# EAGLE board MJ828 - rev.3 - TCAN334 - prod (EAGLE 9.6.2)
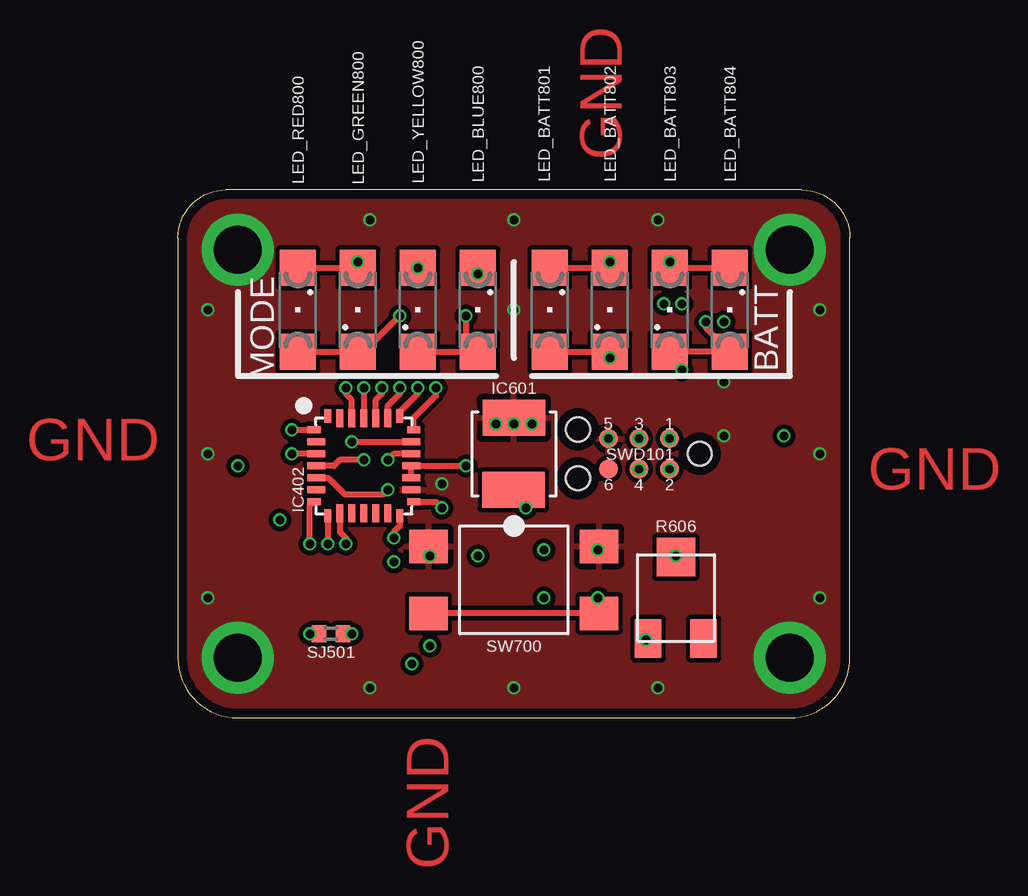
[diagram p0: board, top side]
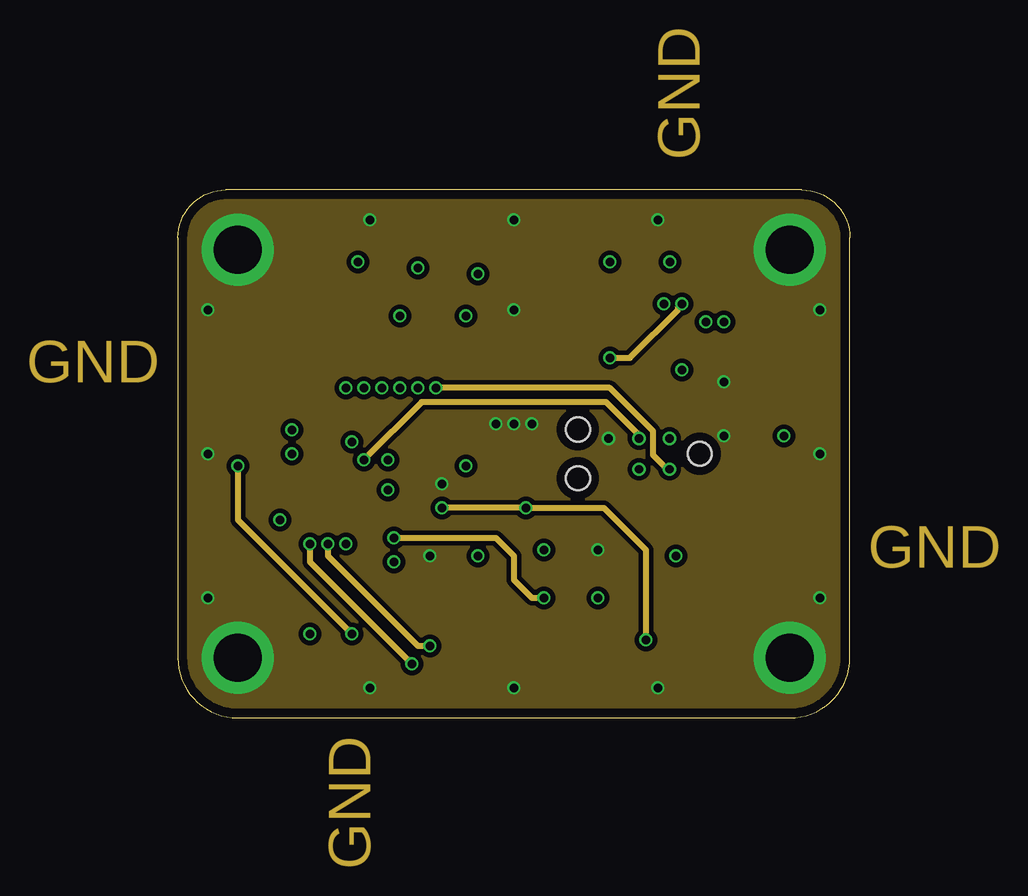
[diagram p1: board, inner layer Route2]
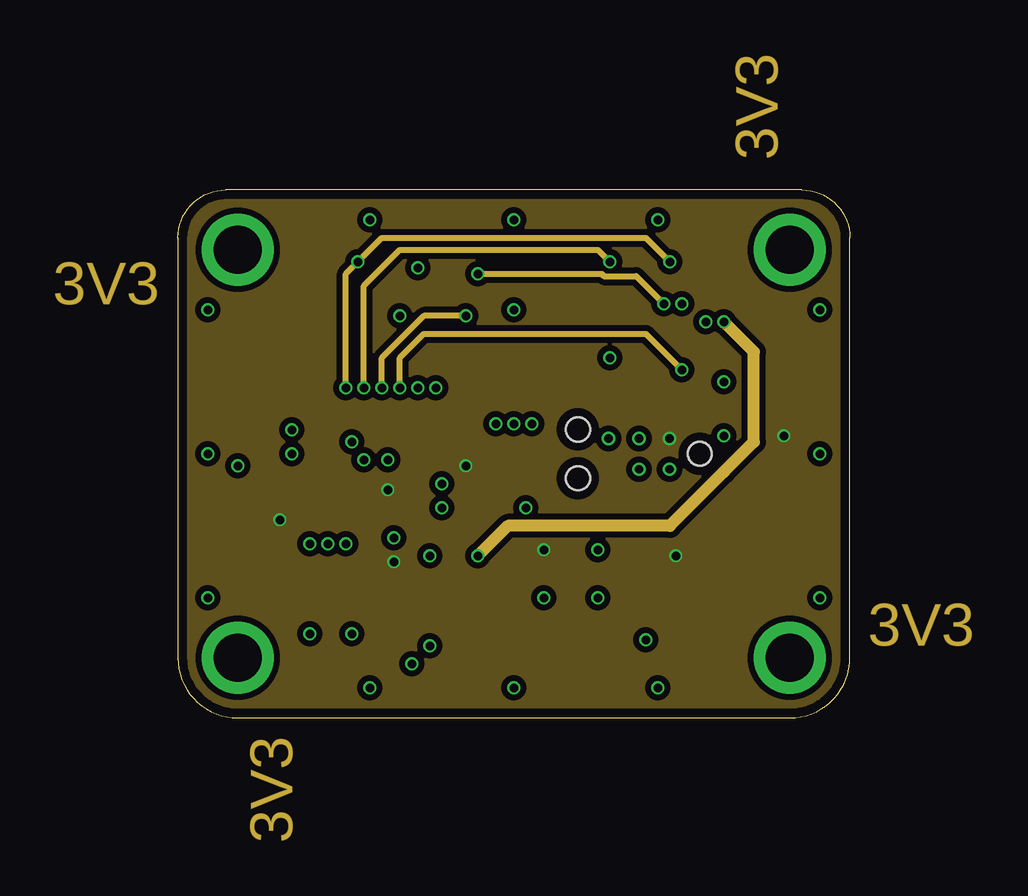
[diagram p2: board, inner layer Route15]
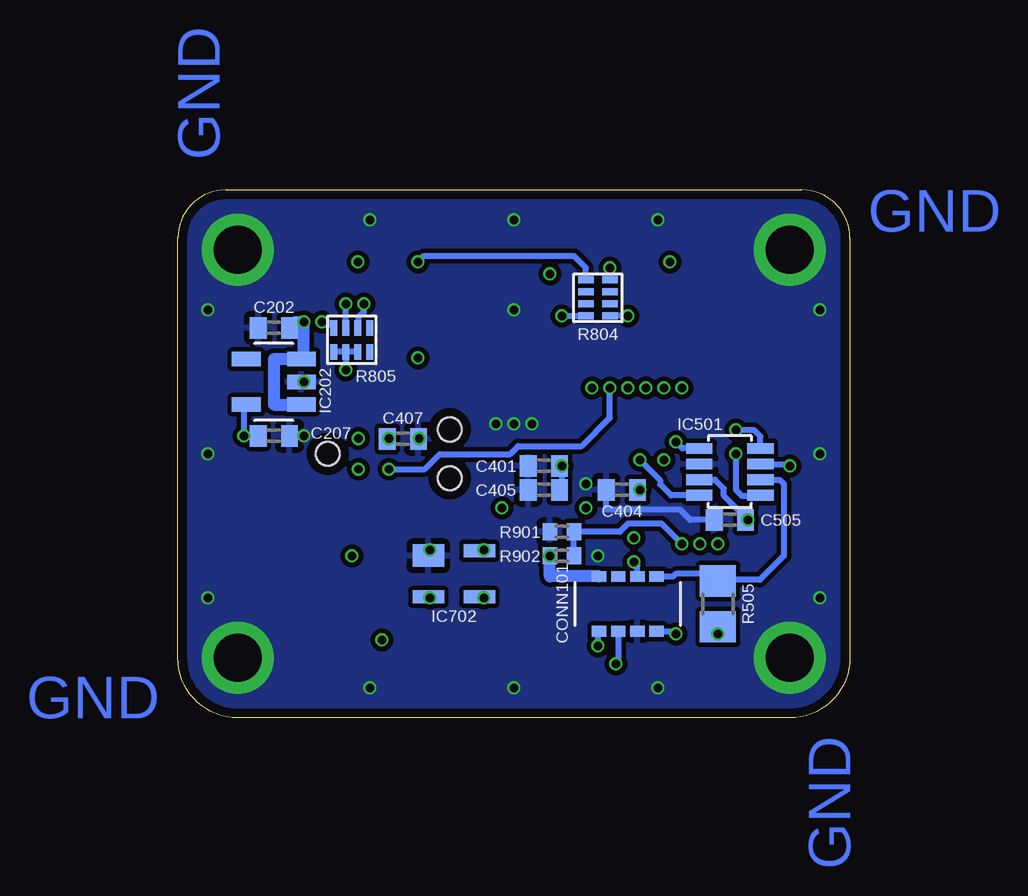
[diagram p3: board, bottom side, seen from below]

Size 28 x 22 mm. Coordinates in mm from the lower left corner, seen from the top.
Outline: 26,22 arc-90 28,20
Outline: 25.5,0 arc90 28,2.5
Outline: 0,2.5 arc90 2.5,0
Outline: 26,22 arc-90 28,20
Outline: 25.5,0 arc90 28,2.5
Outline: 0,2.5 arc90 2.5,0
Outline: 0,2.5 0,20 arc-90 2,22 26,22
Outline: 2.5,0 25.5,0
Outline: 28,2.5 28,20
Copper layers (1*2*15*16): Top 0.035559375mm / dielectric 0.17018125mm / Route2 0.01778125mm / dielectric 47mil / Route15 0.01778125mm / dielectric 0.17018125mm / Bottom 0.035559375mm
Design rules "oshpark-4layer": minimum track width 5mil, minimum drill 10mil, track to track 5mil, track to pad 5mil, pad to pad 5mil, via to via 5mil, smd to smd 5mil, copper to edge 15mil, drill to drill 6mil, minimum pad ring 4mil, minimum via ring 4mil, stop-mask expansion 1.5mil, vias tented up to drill 0mil, thermal gap 10mil
Net classes: 0 GND: width 0.25 mm, drill 0.35 mm, clearance 0.19 mm; 1 BAT+: width 0.5 mm, drill 0.35 mm, clearance 0.19 mm; 3 signal: width 0.25 mm, drill 0.35 mm, clearance 0.19 mm; 4 3V3: width 0.25 mm, drill 0.35 mm, clearance 0.25 mm

## Footprints (pad centres in the part's own frame; a part is rotated, then mirrored left to right if it is on the bottom)
C0402 = smd 0.7 x 0.9: 1 -0.65,0; 2 0.65,0
SMD = smd 0.6 x 0.45: P$1 -1.2,1.14; P$2 -0.4,1.14; P$3 0.4,1.14; P$4 1.2,1.14; P$5 1.2,-1.14; P$6 0.4,-1.14; P$7 -0.4,-1.14; P$8 -1.2,-1.14
SOT-23-5L = smd 0.6 x 1.2: ADJ/NC -0.95,-1.15; EN -0.95,1.15; GND 0,1.15; IN 0.95,1.15; OUT 0.95,-1.15
UFQFPN-28 = smd 0.55 x 0.3: 1_PB8 -2.08,1.5; 7_PA1 -2.08,-1.5; 15_PB1 2.08,-1.5; 21_PA13 2.08,1.5 | smd 0.75 x 0.3: 2_PF0 -1.98,1; 3_PF1 -1.98,0.5; 4_NRST -1.98,0; 5_VDDA -1.98,-0.5; 6_PA0 -1.98,-1; 16_VSS 1.98,-1; 17_VDD 1.98,-0.5; 18_VDDIO2 1.98,0; 19_PA9-[PA11] 1.98,0.5; 20_PA10-[PA12] 1.98,1 | smd 0.3 x 0.55: 8_PA2 -1.5,-2.08; 14_PB0 1.5,-2.08; 22_PA14 1.5,2.08; 28_PB7 -1.5,2.08 | smd 0.3 x 0.75: 9_PA3 -1,-1.98; 10_PA4 -0.5,-1.98; 11_PA5 0,-1.98; 12_PA6 0.5,-1.98; 13_PA7 1,-1.98; 23_PA15 1,1.98; 24_PB3 0.5,1.98; 25_PB4 0,1.98; 26_PB5 -0.5,1.98; 27_PB6 -1,1.98
SOT23-8 = smd 0.45 x 1.1: P$1 -0.975,-1.275; P$2 -0.325,-1.275; P$3 0.325,-1.275; P$4 0.975,-1.275; P$5 0.975,1.275; P$6 0.325,1.275; P$7 -0.325,1.275; P$8 -0.975,1.275
P-LCC-2 = smd 2.6 x 1.5: COLLECTOR -0.02,-1.5; EMITTER 0,1.5
4SOT143 = smd 0.94 x 1.31: 1_GND -0.76,-1.06 | smd 0.55 x 1.31: 2_IN 0.96,-1.06; 3_OUT 0.96,1.06; 4_VCC -0.96,1.06
SML1206 = smd 1.5 x 1.5: A 1.75,0; C -1.75,0
R0805 = smd 1.3 x 1.5: 1 -0.95,0; 2 0.95,0
3313 = smd 1.1 x 1.6: 1_CCW 1.155,-1.7; 3_CW -1.155,-1.7 | smd 1.6 x 1.6: 2_WIPER 0,1.7
0402 = smd 0.65 x 0.3: 1 -0.5,-0.75; 2 0.5,-0.75; 3 -0.5,-0.25; 4 0.5,-0.25; 5 -0.5,0.25; 6 0.5,0.25; 7 -0.5,0.75; 8 0.5,0.75
R0402 = smd 0.6 x 0.7: 1 -0.5,0; 2 0.5,0
SMD' = smd 1.6 x 1.4: 1 -3.556,-1.397; 2 3.556,-1.397; 3 -3.556,1.397; 4 3.556,1.397
TC2030-NL = smd 0.787 x 0.787: 1_TVCC 1.27,-0.635; 2_T_SWDIO 1.27,0.635; 3_T_NRST 2.54,-0.635; 4_T_SWCLK 2.54,0.635; 5_GND 3.81,-0.635; 6_T_SWO 3.81,0.635 | hole 0.991: 0,0; 5.08,-1.016; 5.08,1.016

## Placement (x,y rotation side)
C202  1μF / 10V  [C0402]  24,16.25 180 bottom
C207  1μF  [C0402]  24,11.75 180 bottom
C401  0.1u  [C0402]  12.75,10.5 0 bottom
C404  1u  [C0402]  9.5,9.5 0 bottom
C405  0.1u  [C0402]  12.75,9.5 0 bottom
C407  0.1u  [C0402]  18.62,11.62 180 bottom
C505  0.1μF  [C0402]  5,8.25 180 bottom
CONN101  104250-0820  [SMD]  9.25,4.75 180 bottom
IC202  LDK320AM33R  [SOT-23-5L]  24,14 270 bottom
IC402  STM32F042G6U6  [UFQFPN-28]  7.75,10.5 0 top
IC501  TCAN334  [SOT23-8]  5,10.25 270 bottom
IC601  SFH 320 FA-Z  [P-LCC-2]  14,11 0 top
IC702  MAX6816EUS+T  [4SOT143]  16.5,6 270 bottom
LED_BATT801  156120BS82500  [SML1206]  15.5,17 270 top
LED_BATT802  156120BS82500  [SML1206]  18,17 90 top
LED_BATT803  156120BS82500  [SML1206]  20.5,17 90 top
LED_BATT804  156120BS82500  [SML1206]  23,17 270 top
LED_BLUE800  156120BS82500  [SML1206]  12.5,17 270 top
LED_GREEN800  156120VS82500  [SML1206]  7.5,17 90 top
LED_RED800  156120RS82500  [SML1206]  5,17 270 top
LED_YELLOW800  156120YS82500  [SML1206]  10,17 90 top
R505  120  [R0805]  5.5,4.75 270 bottom
R606  3313J-1-104E - 100k  [3313]  20.75,5 0 top
R804  741X083151JP / 150Ω  [0402]  10.5,17.5 180 bottom
R805  741X083101JP / 100Ω  [0402]  20.75,15.75 270 bottom
R901  100k  [R0402]  12,7.75 0 bottom
R902  100k  [R0402]  12,6.75 180 bottom
SJ501  CAN termination  [R0402]  6.38,3.5 0 top
SW700  TL3305CF160QG  [SMD']  14,5.75 0 top
SWD101  TC2030-NL  [TC2030-NL]  21.75,11 180 top

## Library data of the parts
C202 C207 C401 C404 C405 C407 C505 = rcl; SPICEPREFIX: C
CONN101 = 1042500820 - Board to Board Connector, 8p - Header
IC202 = LDK320 5V LDO
IC402 = STM32F042G6
IC501 = TCAN33x - 3.3V CAN Transciever
IC601 = SFH 320 FA - IR Phototransistor
IC702 = MAX6818 CMOS Switch debouncer
LED_BATT801-LED_BATT804 LED_BLUE800 LED_GREEN800 LED_RED800 LED_YELLOW800 = led
R505 R901 R902 SJ501 = rcl; SPICEPREFIX: R
R606 = 3313 - Trim Poti
R804 R805 = 741X083331JP Resistor Array
SW700 = TL3305-844809 SPST-NO Tact Switch
SWD101 = tag-connect

## Nets
3V3 [3V3]: C207.2 C401.2 C404.2 C405.2 C505.1 CONN101.P$7 IC202.OUT IC402.5_VDDA IC402.17_VDD IC402.18_VDDIO2 IC501.P$3 IC702.4_VCC R606.2_WIPER SWD101.1_TVCC
!SHDN!: IC402.3_PF1 IC501.P$5
!STBY! [signal]: IC402.1_PB8 IC501.P$8
BAT+ [BAT+]: C202.1 CONN101.P$5 IC202.EN IC202.IN R902.2
BREAK_IN [signal]: CONN101.P$4 IC402.8_PA2
CAN_H [signal]: CONN101.P$1 IC501.P$7 SJ501.2
CAN_INFRA:CAN_JMPR [signal]: R505.2 SJ501.1
CAN_L [signal]: CONN101.P$8 IC501.P$6 R505.1
CAN_RX [signal]: IC402.19_PA9-[PA11] IC501.P$4
CAN_TX [signal]: IC402.20_PA10-[PA12] IC501.P$1
CP1 [signal]: IC402.26_PB5 LED_BATT803.A LED_BATT804.C LED_GREEN800.A LED_RED800.C
CP2 [signal]: IC402.24_PB3 LED_BLUE800.A LED_YELLOW800.C R804.8
CP3 [signal]: IC402.25_PB4 LED_BATT801.C LED_BATT802.A R804.2
CP4 [signal]: IC402.23_PA15 R805.2 R805.4 R805.6
GND: C202.2 C207.1 C401.1 C404.1 C405.1 C407.1 C505.2 CONN101.P$2 IC202.GND IC402.16_VSS IC501.P$2 IC601.EMITTER IC702.1_GND R901.1 SW700.3 SW700.4 SWD101.5_GND
HIGH_IN [signal]: CONN101.P$3 IC402.7_PA1
LED:D_BATT1&2 [signal]: LED_BATT801.A LED_BATT802.C R805.3
LED:D_BATT3&4 [signal]: LED_BATT803.C LED_BATT804.A R805.1
LED:D_BLUE [signal]: LED_BLUE800.C R805.5
LED:D_RED&GREEN [signal]: LED_GREEN800.C LED_RED800.A R804.7
LED:D_YELLOW [signal]: LED_YELLOW800.A R804.1
PHOTOTRANSISTOR: IC402.15_PB1 IC601.COLLECTOR R606.3_CW
PUSHBUTTON:SWITCH_IN: IC702.2_IN SW700.1 SW700.2
SWITCH: IC402.14_PB0 IC702.3_OUT
SYS_NRST [signal]: C407.2 IC402.4_NRST SWD101.3_T_NRST
SYS_SWCLK [signal]: IC402.22_PA14 SWD101.4_T_SWCLK
SYS_SWDIO [signal]: IC402.21_PA13 SWD101.2_T_SWDIO
VBAT+: IC402.9_PA3 R901.2 R902.1

## Tracks (layer width: path | path; a pad name or v marks a point on that pad's centre or on a via)
3V3  (via drill 0.35)
  Top 0.25: IC402.17_VDD IC402.18_VDDIO2 v12,10.5 | SWD101.1_TVCC v20.48,11.64 | R606.2_WIPER v20.75,6.75 | v8.75,9.5 8.55,9.3 6.97,9.3 6.27,10 IC402.5_VDDA
  Bottom 0.25: IC202.OUT 25.25,12.95 v25.25,11.75 C207.2 | CONN101.P$7 8.85,6.35 v9,6.5 | C401.2 v12,10.5 12,9.6 C405.2 | IC702.4_VCC 15.29,6.96 v15.25,7 | C404.2 v8.75,9.5 | v4.25,8.25 C505.1 4.35,8.35 5.25,9.25 5.25,9.55 5.62,9.93 IC501.P$3
  pour Route15: 0,22 28,22 28,0 0,0
!SHDN!  (via drill 0.35)
  Top 0.25: IC402.3_PF1 v4.75,11
  Bottom 0.25: v4.75,11 4.75,9.5 4.5,9.25 3.75,9.25 IC501.P$5
!STBY!  (via drill 0.35)
  Top 0.25: v4.75,12 IC402.1_PB8
  Bottom 0.25: v4.75,12 4,12 3.73,11.72 IC501.P$8
BAT+  (via drill 0.35)
  Route15 0.5: R902.2 13.75,8 20.5,8 22.75,10.25 24,11.5 24,15.25 v22.75,16.5
  Bottom 0.5: C202.1 23.1,16.5 v22.75,16.5 22.75,15.05 IC202.EN 24,14.95 24,13.05 IC202.IN | R902.2 12.5,5.89 CONN101.P$5
  other vias: 12.5,6.75
BREAK_IN  (via drill 0.35)
  Top 0.25: IC402.8_PA2 v6.25,7.25
  Route2 0.25: v6.25,7.25 6.25,6.75 10,3 v10.5,3
  Bottom 0.25: CONN101.P$4 10.5,3.56 v10.5,3
CAN_H  (via drill 0.35)
  Top 0.25: v7.25,3.5 SJ501.2
  Route2 0.25: v7.25,3.5 2.5,8.25 v2.5,10.5
  Bottom 0.25: v2.5,10.5 2.58,10.57 IC501.P$7 | CONN101.P$1 7.36,3.61 v7.25,3.5
CAN_INFRA:CAN_JMPR  (via drill 0.35)
  Top 0.25: v5.5,3.5 SJ501.1
  Bottom 0.25: R505.2 v5.5,3.5
CAN_L
  Bottom 0.25: CONN101.P$8 7.36,5.89 7.25,6 5.8,6 5.55,5.75 | R505.1 5.55,5.75 | 5.55,5.75 3.75,5.75 2.75,6.75 2.75,9.75 2.92,9.91 3.25,9.91 3.44,9.91 3.71,9.91 IC501.P$6
CAN_RX  (via drill 0.35)
  Top 0.25: IC402.19_PA9-[PA11] 9,11 v8.75,10.75
  Bottom 0.25: v8.75,10.75 7.9,9.9 7.9,9.73 7.71,9.54 7.45,9.28 IC501.P$4
CAN_TX  (via drill 0.35)
  Top 0.25: v7.25,11.5 IC402.20_PA10-[PA12]
  Bottom 0.25: v7.25,11.5 6.97,11.22 IC501.P$1
CP1  (via drill 0.35)
  Top 0.25: LED_RED800.C LED_GREEN800.A v7.5,19 | LED_BATT804.C LED_BATT803.A v20.5,19 | v7,13.75 7,13.5 7.21,13.29 7.21,12.52 IC402.26_PB5
  Route15 0.25: v20.5,19 19.5,20 8.5,20 v7.5,19 7,18.5 v7,13.75
CP2  (via drill 0.35)
  Top 0.25: LED_YELLOW800.C LED_BLUE800.A 12,15.75 v12,16.75 | IC402.24_PB3 8.25,13.25 8.5,13.5 v8.5,13.75
  Route15 0.25: v12,16.75 10.25,16.75 8.5,15 v8.5,13.75
  Bottom 0.25: v12,16.75 R804.8
CP3  (via drill 0.35)
  Top 0.25: LED_BATT801.C LED_BATT802.A v18,19 | v7.75,13.75 IC402.25_PB4
  Route15 0.25: v7.75,13.75 7.75,18 9.25,19.5 17.5,19.5 v18,19
  Bottom 0.25: R804.2 11,18.75 11.5,19.25 17.75,19.25 v18,19
CP4  (via drill 0.35)
  Top 0.25: v9.25,13.75 9.25,13.5 8.75,13 IC402.23_PA15
  Route15 0.25: v21,14.5 19.5,16 10.25,16 9.25,15 v9.25,13.75
  Bottom 0.25: R805.6 R805.4 | R805.4 R805.2 | R805.4 v21,14.5
GND  (via drill 0.35, 2)
  Bottom 0.25: C404.1 10.15,8.68 7.08,8.68 6.65,8.25 C505.2
  other vias: 2.5,19.5 2.5,2.5 25.5,2.5 25.5,19.5 14,17 14,20.75 20,20.75 8,20.75 17.94,11.64 11,9.75 17.5,7 8,1.25 14,1.25 20,1.25 26.75,11 1.25,11 1.25,5 1.25,17 26.75,17 26.75,5 22.75,11.75 22.75,14 10.5,6.75 14,12.25 13.25,12.25 14.75,12.25
  pour Top: 0,22 28,22 28,0 0,0
  pour Route2: 0,22 28,22 28,0 0,0
  pour Bottom: 0,22 28,22 28,0 0,0
HIGH_IN  (via drill 0.35)
  Top 0.25: v5.5,7.25 5.5,8.83 IC402.7_PA1
  Route2 0.25: v5.5,7.25 5.5,6.5 v9.75,2.25
  Bottom 0.25: CONN101.P$3 9.65,2.35 v9.75,2.25
LED:D_BATT1&2  (via drill 0.35)
  Top 0.25: LED_BATT801.A LED_BATT802.C v18,15
  Route2 0.25: v21,17.25 20.84,17.09 20.84,17 18.84,15 v18,15
  Bottom 0.25: R805.3 v21,17.25
LED:D_BATT3&4  (via drill 0.35)
  Top 0.25: LED_BATT803.C LED_BATT804.A 22,16.25 v22,16.5
  Bottom 0.25: R805.1 21.75,16.5 v22,16.5
LED:D_BLUE  (via drill 0.35)
  Top 0.25: LED_BLUE800.C v12.5,18.5
  Route15 0.25: v12.5,18.5 17.66,18.5 17.75,18.41 19.09,18.41 v20.25,17.25
  Bottom 0.25: R805.5 20.46,16.29 20.46,16.7 20.25,16.92 v20.25,17.25
LED:D_RED&GREEN  (via drill 0.35)
  Top 0.25: LED_RED800.A LED_GREEN800.C 7.75,15.25 v9.25,16.75
  Bottom 0.25: v9.25,16.75 R804.7
LED:D_YELLOW  (via drill 0.35)
  Bottom 0.25: LED_YELLOW800.A R804.1
  other vias: 10,18.75
PHOTOTRANSISTOR  (via drill 0.35)
  Top 0.25: IC402.15_PB1 10.75,9 v11,8.75 | R606.3_CW 19.55,3.25 v19.5,3.25 | IC601.COLLECTOR 14.5,8.98 v14.5,8.75
  Route2 0.25: v11,8.75 v14.5,8.75 17.75,8.75 19.5,7 v19.5,3.25
PUSHBUTTON:SWITCH_IN  (via drill 0.35)
  Top 0.25: SW700.1 SW700.2 17.5,4.41 v17.5,5
  Bottom 0.25: IC702.2_IN 17.54,5.04 v17.5,5
SWITCH  (via drill 0.35)
  Top 0.25: IC402.14_PB0 9.25,8 9,7.75 v9,7.5
  Route2 0.25: v15.25,5 14.75,5 14,5.75 14,6.75 13.25,7.5 v9,7.5
  Bottom 0.25: IC702.3_OUT 15.4,5 v15.25,5
SYS_NRST  (via drill 0.35)
  Top 0.25: v7.75,10.75 6.75,10.75 6.5,10.5 IC402.4_NRST | SWD101.3_T_NRST v19.21,11.64
  Route2 0.25: v19.21,11.64 19.21,11.79 17.84,13.16 10.16,13.16 v7.75,10.75
  Bottom 0.25: C407.2 19.23,11.62 v19.21,11.64
SYS_SWCLK  (via drill 0.35)
  Top 0.25: v10,13.75 10,13.5 9.25,12.75 IC402.22_PA14 | SWD101.4_T_SWCLK v19.21,10.36
  Bottom 0.25: v19.21,10.36 17.71,10.36 17.09,10.98 14.16,10.98 13.82,11.32 11.18,11.32 10,12.5 v10,13.75
SYS_SWDIO  (via drill 0.35)
  Top 0.25: v10.75,13.75 10.75,13.42 9.83,12.5 IC402.21_PA13 | SWD101.2_T_SWDIO v20.48,10.36
  Route2 0.25: v20.48,10.36 20.39,10.36 19.8,10.95 19.8,11.95 18,13.75 v10.75,13.75
VBAT+  (via drill 0.35)
  Top 0.25: v7,7.25 7,7.5 6.75,7.75 IC402.9_PA3
  Bottom 0.25: R902.1 R901.2 9.59,7.75 9.24,8.09 7.84,8.09 v7,7.25

## Text on the board
Top: GND | GND | GND | GND
Route2: GND | GND | GND | GND
Route15: 3V3 | 3V3 | 3V3 | 3V3
Bottom: GND | GND | GND | GND
tPlace: MODE | BATT
tStop: MJ-828 / ejovrh v.3